# Altium PCB RT_SUPER_C.PCBdoc (part 2 of 3)
Units mil, origin at the board's own origin, x right, y up, seen from the top; angles counter-clockwise.
Board outline 1181.1 x 1181.1 mil, 4 copper layers (Top Layer, GND, PWR, Bottom Layer), stack 39.556 mil thick; 97 components, 119 nets, 508 pads, 144 vias.
Unrouted connection lines stored in the file: 163.
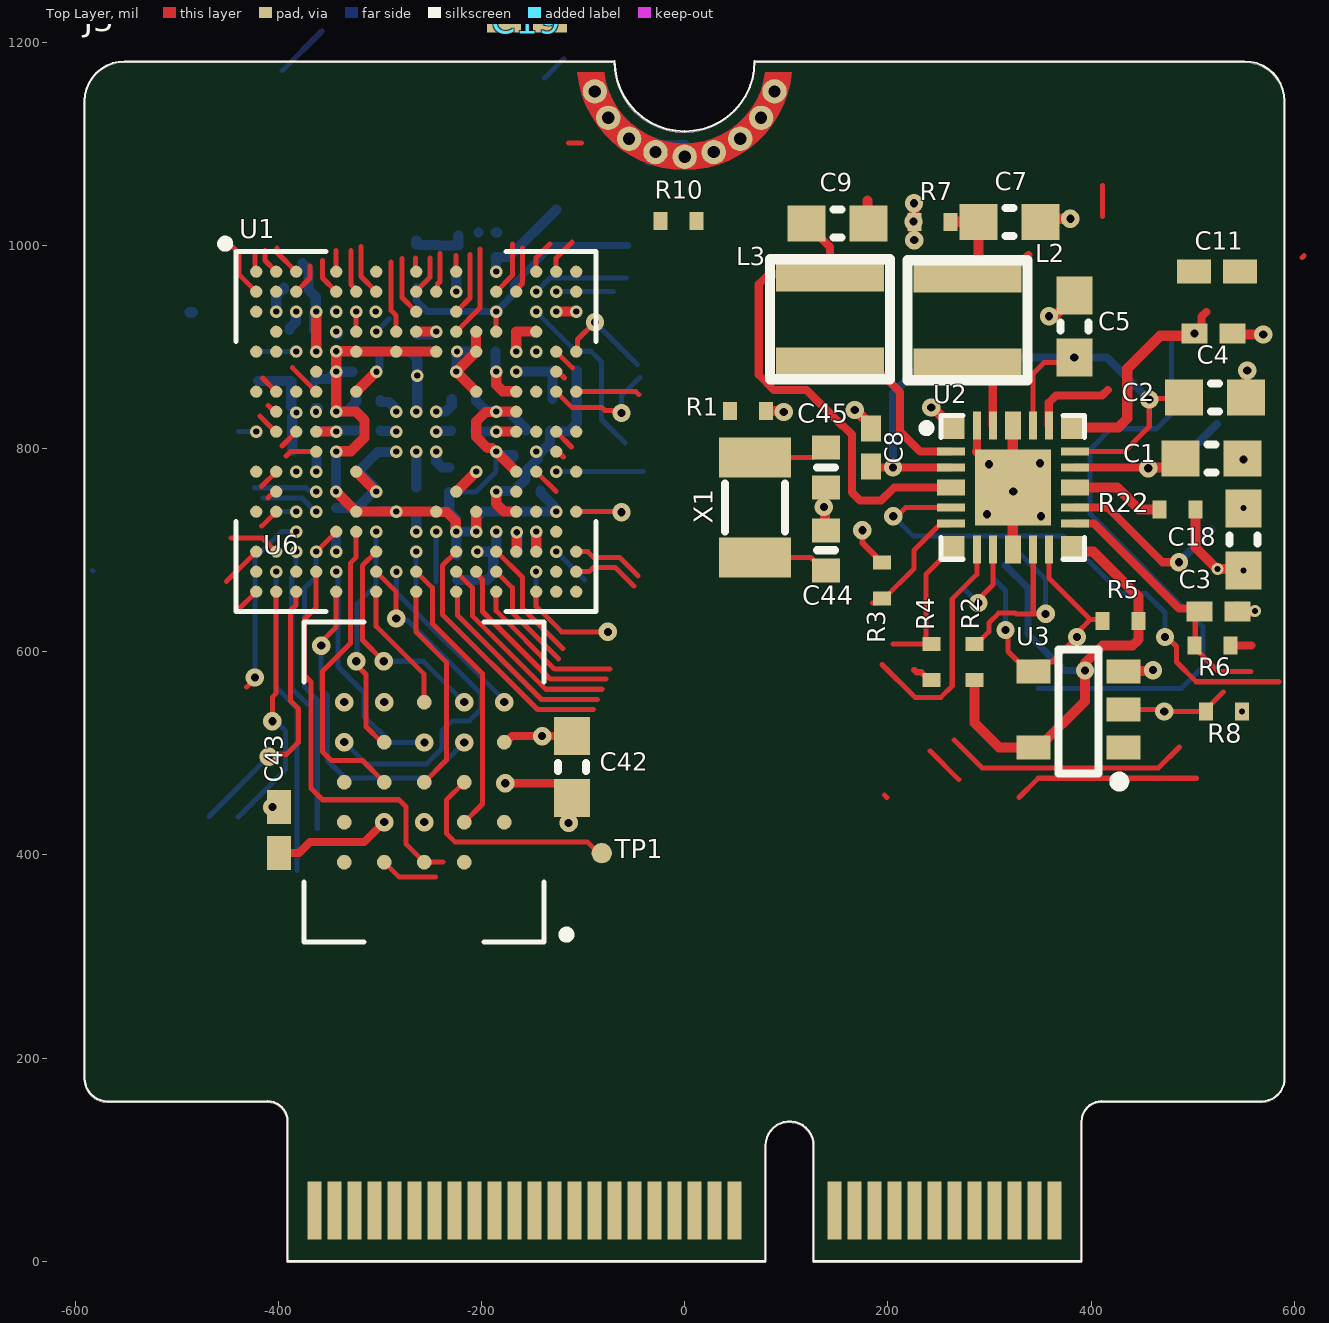
[diagram p0: Top Layer view]

## Via types
v1: diameter 12, hole 6, Top Layer to Bottom Layer, tented both sides, 83 vias
v2: diameter 18, hole 8, Top Layer to Bottom Layer, tented both sides, 61 vias

## Nets (pads, with @x,y where several pads share a name; then routed paths per layer and width w, separated by ;. In a path a pad name is that pad's centre, name@x,y a point inside that pad or via, vN(x,y) a via of type N, cw(c..) or ccw(c..) an arc to the next point about the centre after c; other vN are vias at no path point) (continued)
+1v8: (continued)
  PWR w10: v1(-362.65,777.17) -363.03,777.55 -363.03,790.35 -369.22,796.54 -392.86,796.54 -421.22,768.18 -421.22,672.54 -406.22,657.54 -190.06,657.54 -146.49,701.1 -146.49,717.73 v1(-146.11,718.11) -146.11,750.65 -137.22,759.54 -106.08,759.54 -100.22,765.4 -100.22,849.39 v1(-146.11,895.28) -146.11,914.96 -145.13,915.95 ; v1(-362.65,934.65) v1(-362.65,895.28) -362.65,868.96 -349.22,855.54 -205.54,855.54 v1(-185.48,875.59) -185.22,875.85 -185.22,913.72 -187.45,915.95 ; v1(-185.48,974.02) -219.36,974.02 -224.47,968.91 -224.47,954.72 v1(-224.85,954.33) -224.47,953.95 -224.47,939.19 -201.23,915.95 -187.45,915.95 ; v1(-106.74,934.65) v1(-126.43,934.65) -126.43,921.81 -132.28,915.95 -145.13,915.95 ; -187.45,915.95 -145.13,915.95
  Bottom Layer w10: -376.19,982.52 -370.33,976.66 C38.2@-370.33,958.27 -370.33,956.46 -363.03,949.16 -363.03,935.03 v1(-362.65,934.65) -362.65,934.11 -364.73,932.02 -364.73,916.62 C39.2@-364.81,916.54 ; v1@-363.19,777.17 v1(-362.65,777.17) -362.3,777.51 C40.2@-362.22,797.69 C40.2@-362.22,797.69 ; v1@-224.75,954.43 v1(-224.85,954.33) -224.85,975.64 -224.77,975.72 C36.2@-224.65,975.72 ; C41.2@-186.22,895.54 -186.22,876.87 -185.48,876.13 v1(-185.48,875.59) ; C37.2@-186.22,988.59 C37.2@-185.92,988.59 ; v1@-185.22,974.27 -185.84,974.89 -185.84,988.51 C37.2@-185.92,988.59 ; -126.43,1035.01 -172.84,988.59 C37.2@-185.92,988.59
+1v8_AO: C10.2 R2.2 R5.2 U1.C13 U1.D13 U2.12 U3.5 | length 833.5
  Top Layer w5: U1.D13@-185.48,914.96 v1(-185.48,934.65)
  Top Layer w10: R2.2@285.38,572.01 285.38,529.86 309.62,505.62 U3.5@343.14,505.62 348.35,505.62 394,551.27 v2(394,581.37) 394,588.78 411.25,606.02 440.82,606.02 446.68,611.88 R5.2@446.68,630.41 446.68,654 402.19,698.5 386.09,698.5 U2.12@382.03,702.56
  Bottom Layer w7: C10.2@-264.22,959.25 -264.22,945.54 -253.33,934.65 v1(-185.48,934.65) -168.42,951.71 -168.42,961.66 -130.28,999.8 -55.84,999.8 ; 315.41,685 337.81,662.59 337.81,617.25 373.69,581.37 v2(394,581.37)